# Altium PCB Arcadinator.PcbDoc
Units mil, origin at the board's own origin, x right, y up, seen from the top; angles counter-clockwise.
Board outline 1662.88 x 3742.88 mil, 2 copper layers (Top Layer, Bottom Layer); 28 components, 37 nets, 100 pads, 3 vias.
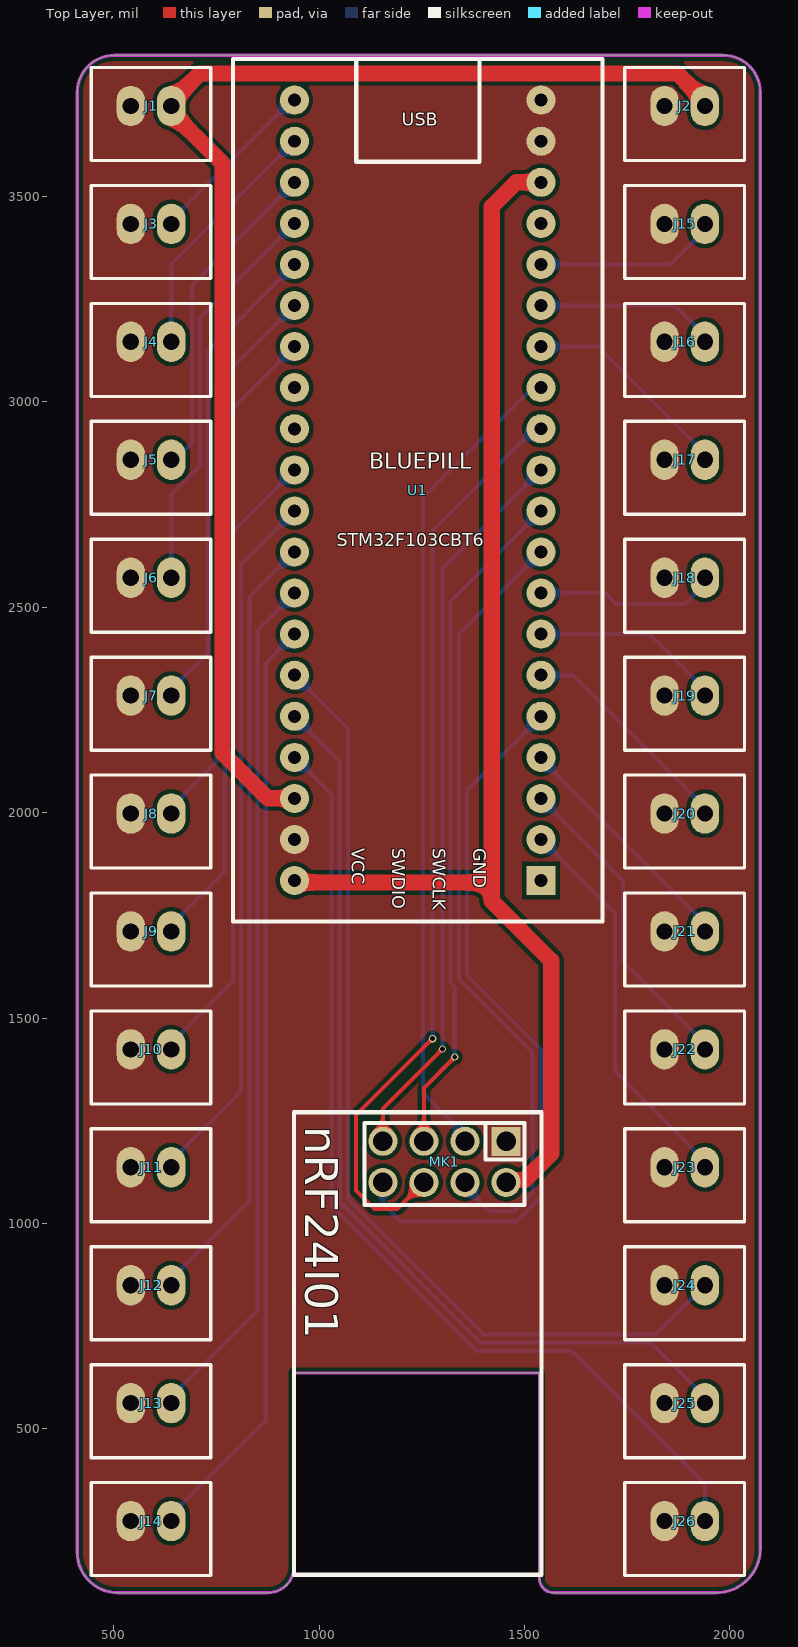
[diagram p0: Top Layer view]
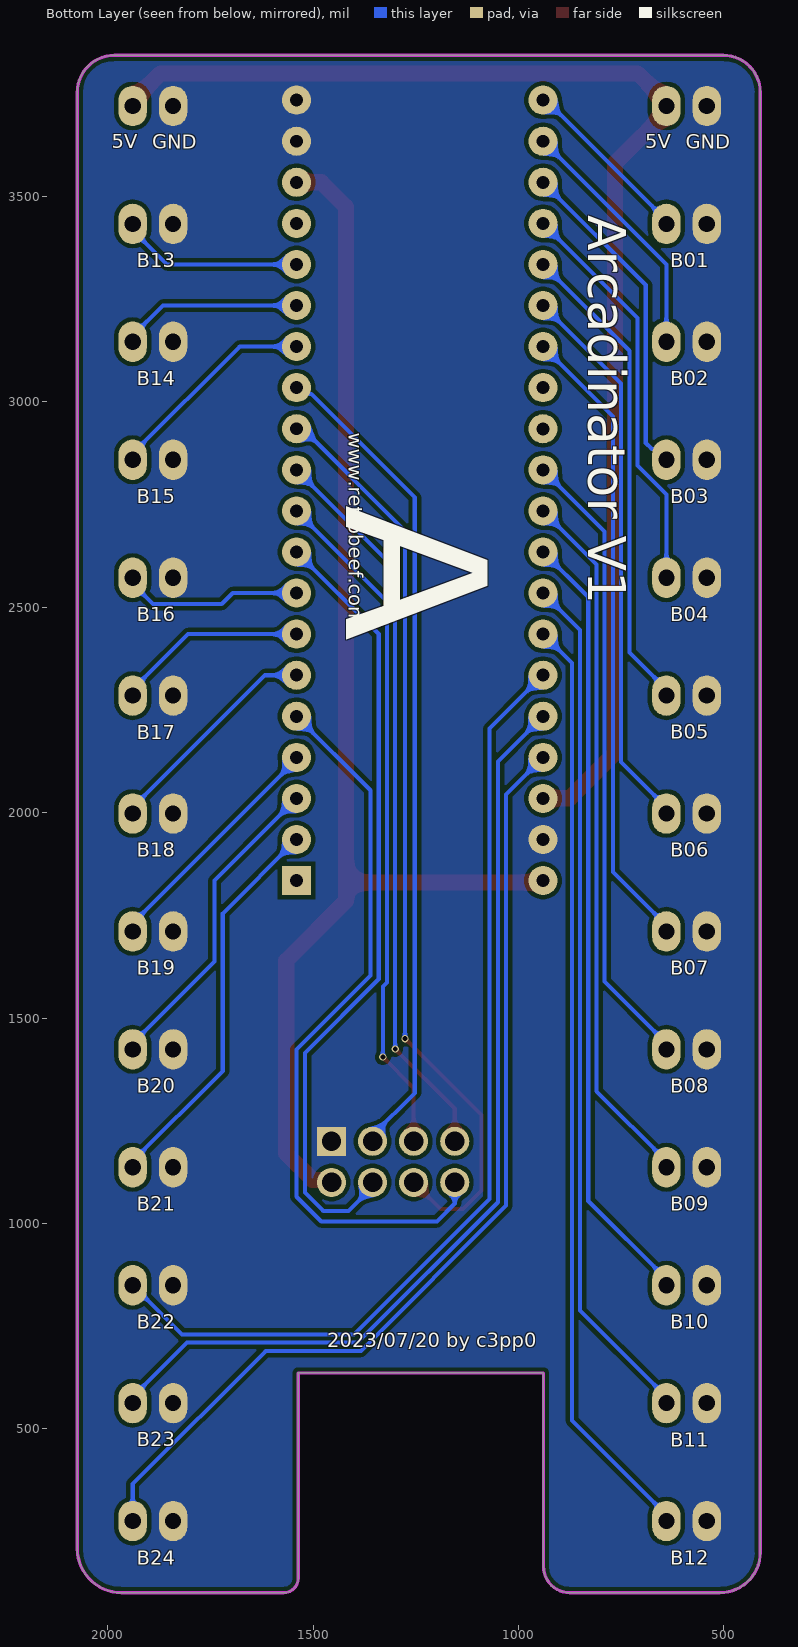
[diagram p1: Bottom Layer view, seen from below]
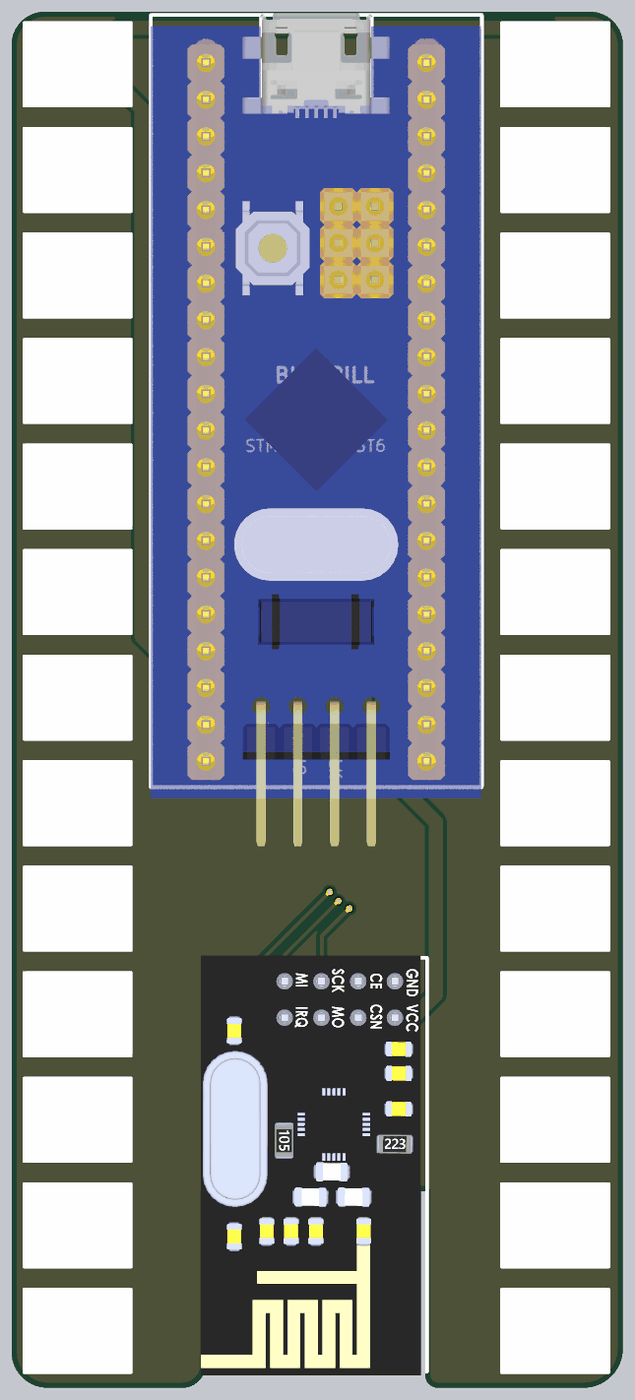
[diagram p2: 3D render of the assembled board from above, using the file's embedded part models]

## Layer stack, top to bottom
Top Solder: solder mask 0.4, Solder Resist, Dk 3.5
Top Layer: signal copper 1.4
Dielectric 1: dielectric 12.6, FR-4, Dk 4.8
Bottom Layer: signal copper 1.4
Bottom Solder: solder mask 0.4, Solder Resist, Dk 3.5

## Board outline
411.06,199.25 ccw(c509.25,199.25) 509.25,101.06 875.23,101.06 ccw(c875.23,164.77) 938.94,164.77 938.94,636.06 1536.06,636.06 1536.06,136.15 ccw(c1571.15,136.15) 1571.15,101.06 1966.74,101.06 ccw(c1966.74,208.26) 2073.94,208.26 2073.94,3753.84 ccw(c1983.84,3753.84) 1983.84,3843.94 501.16,3843.94 ccw(c501.16,3753.84) 411.06,3753.84

## Design rules (kind name [scope] priority, off if disabled: settings)
Clearance [All] p1: gap=10 ignorepadtopadclearanceinfootprint=FALSE except(0: Arc-Hole Track-Hole SMDPad-Hole THPad-Hole Via-Hole Fill-Hole Poly-Hole Region-Hole Text-Hole)
PlaneConnect [All] p1: planeconnectstyle=Direct reliefexpansion=20 reliefentries=4 reliefconductorwidth=10 reliefairgap=10
PolygonConnect [All] p1: connectstyle=Direct reliefconductorwidth=10 reliefentries=4 polygonreliefangle="90 Angle" airgapwidth=10
RoutingVias [All] p1: holewidth=28 width=50 viastyle="Through Hole" minholewidth=28 minwidth=50 maxholewidth=28 maxwidth=50
SolderMaskExpansion [All] p1: expansion=4 istentingtop=FALSE
Width [All] p1: maxlimit=78.74 minlimit=10 preferedwidth=10 minimp=50.000000 maximp=50.000000 favimp=50.000000
29 further rules are at their usual default settings.

## Components (designator, comment, footprint, x,y, rotation, side; value= is the part's Value field where it differs from the comment)
J1 "JST B2B-XH-A" "JST XH B2B-XH-A" 590.55,3720.47 r0 top
J2 "JST B2B-XH-A" "JST XH B2B-XH-A" 1889.76,3720.47 r0 top
J3 "JST B2B-XH-A" "JST XH B2B-XH-A" 590.55,3433.4 r0 top
J4 "JST B2B-XH-A" "JST XH B2B-XH-A" 590.55,3146.32 r0 top
J5 "JST B2B-XH-A" "JST XH B2B-XH-A" 590.55,2859.25 r0 top
J6 "JST B2B-XH-A" "JST XH B2B-XH-A" 590.55,2572.18 r0 top
J7 "JST B2B-XH-A" "JST XH B2B-XH-A" 590.55,2285.1 r0 top
J8 "JST B2B-XH-A" "JST XH B2B-XH-A" 590.55,1998.03 r0 top
J9 "JST B2B-XH-A" "JST XH B2B-XH-A" 590.55,1710.96 r0 top
J10 "JST B2B-XH-A" "JST XH B2B-XH-A" 590.55,1423.88 r0 top
J11 "JST B2B-XH-A" "JST XH B2B-XH-A" 590.55,1136.81 r0 top
J12 "JST B2B-XH-A" "JST XH B2B-XH-A" 590.55,849.74 r0 top
J13 "JST B2B-XH-A" "JST XH B2B-XH-A" 590.55,562.66 r0 top
J14 "JST B2B-XH-A" "JST XH B2B-XH-A" 590.55,275.59 r0 top
J15 "JST B2B-XH-A" "JST XH B2B-XH-A" 1889.76,3433.4 r0 top
J16 "JST B2B-XH-A" "JST XH B2B-XH-A" 1889.76,3146.32 r0 top
J17 "JST B2B-XH-A" "JST XH B2B-XH-A" 1889.76,2859.25 r0 top
J18 "JST B2B-XH-A" "JST XH B2B-XH-A" 1889.76,2572.18 r0 top
J19 "JST B2B-XH-A" "JST XH B2B-XH-A" 1889.76,2285.1 r0 top
J20 "JST B2B-XH-A" "JST XH B2B-XH-A" 1889.76,1998.03 r0 top
J21 "JST B2B-XH-A" "JST XH B2B-XH-A" 1889.76,1710.96 r0 top
J22 "JST B2B-XH-A" "JST XH B2B-XH-A" 1889.76,1423.88 r0 top
J23 "JST B2B-XH-A" "JST XH B2B-XH-A" 1889.76,1136.81 r0 top
J24 "JST B2B-XH-A" "JST XH B2B-XH-A" 1889.76,849.74 r0 top
J25 "JST B2B-XH-A" "JST XH B2B-XH-A" 1889.76,562.66 r0 top
J26 "JST B2B-XH-A" "JST XH B2B-XH-A" 1889.76,275.59 r0 top
MK1 "NRF24L01 BOARD" WIRELM-SMD_AI_NRF24L01 1305,1150 r270 top
U1 "BLUEPILL" BLUEPILL 1240.16,1834.65 r0 top

## Footprints (in the part's own frame and the unit in brackets; to place one, negate y for a bottom-side part, rotate by r counter-clockwise, add the part's x,y. Pads: shape width x height; smd on the part's side, far side on the other; paste and mask are expansions set on the pad)
BLUEPILL [mm]
  rect 1.8x1.8 hole 0.8 paste+0 mask+0.102: 1(7.62,0)
  round 1.8 hole 0.8 paste+0 mask+0.102: 2(7.618,2.542) 3(7.618,5.082) 4(7.618,7.622) 5(7.618,10.162) 6(7.618,12.702) 7(7.618,15.242) 8(7.618,17.782) 9(7.618,20.322) 10(7.618,22.862) 11(7.618,25.402) 12(7.618,27.942) 13(7.618,30.482) 14(7.618,33.022) 15(7.618,35.562) 16(7.618,38.102) 17(7.618,40.642) 18(7.618,43.182) 19(7.618,45.722) 20(7.618,48.262) 21(-7.622,48.262) 22(-7.622,45.722) 23(-7.622,43.182) 24(-7.622,40.642) 25(-7.622,38.102) 26(-7.622,35.562) 27(-7.622,33.022) 28(-7.622,30.482) 29(-7.62,27.94) 30(-7.622,25.402) 31(-7.622,22.862) 32(-7.622,20.322) 33(-7.622,17.782) 34(-7.622,15.242) 35(-7.622,12.702) 36(-7.622,10.162) 37(-7.622,7.622) 38(-7.622,5.082) 39(-7.622,2.542) 40(-7.622,0.002)
  silkscreen extent -11.43,-2.54 11.43,50.8, body extent -11.44,-6.63 11.42,50.93, height 12.47
"JST XH B2B-XH-A" [mm]
  oval 1.75x2.5 hole 1: 1(-1.25,0) 2(1.25,0)
  silkscreen extent -3.7,-3.38 3.7,2.38, body extent -3.7,-3.38 3.7,2.38, height 7
WIRELM-SMD_AI_NRF24L01 [mm]
  rect 1.8x1.8 hole 1.2 paste+0 mask+0.051: 1(-1.27,3.81)
  round 1.8 hole 1.2 paste+0 mask+0.051: 2(1.27,3.807) 3(-1.27,1.27) 4(1.27,1.27) 5(-1.27,-1.27) 6(1.27,-1.27) 7(-1.27,-3.81) 8(1.27,-3.81)
  silkscreen extent -3.07,-9.31 25.53,5.99, body extent -3.23,-9.64 25.77,5.56, height 7.55

## Part data
J1 J2 J3 J4 J5 J6 J7 J8 J9 J10 J11 J12 J13 J14 J15 J16 J17 J18 J19 J20 J21 J22 J23 J24 J25 J26: "2,54 mm JST-XH Connector, 2 Pins"
MK1: BOM_JLCPCB Part Class="Extended Part", BOM_Manufacturer=Ai-Thinker(安信可), BOM_Manufacturer Part=NF-04, BOM_Supplier=LCSC, BOM_Supplier Part=C90751, spicePre=M, spiceSymbolName="NRF24L01 BOARD"
U1: BOM_Supplier Part=undefined, Contributor=rom1nux, spicePre=U, spiceSymbolName=BLUEPILL

## Via types
v1: diameter 17.72, hole 11.81, Top Layer to Bottom Layer, 3 vias

## Nets (pads, with @x,y where several pads share a name; then routed paths per layer and width w, separated by ;. In a path a pad name is that pad's centre, name@x,y a point inside that pad or via, vN(x,y) a via of type N, cw(c..) or ccw(c..) an arc to the next point about the centre after c; other vN are vias at no path point)
+3.3: MK1.2 U1.18 U1.40 | length 3130.8
  Top Layer w39.37: U1.40 944.78,1830 1420,1830 ; MK1.2 1460.92,1106.03 1501.03,1106.03 1565,1170 1565,1640 1420,1785 1420,1830 ; U1.18 1479.71,3534.71 1420,3475 1420,1830
+5: J1.2 J2.2 U1.38 | length 3235.3
  Top Layer w39.37: U1.38 939.78,2035 875,2035 765,2145 765,3580.47 627.74,3717.74 709.82,3799.82 1871.33,3799.82 1938.98,3732.18 J2.2
BUT01: J3.2 U1.21 | length 429.7
  Bottom Layer w10: J3.2 639.76,3441.28 933.19,3734.71 U1.21
BUT02: J4.2 U1.22 | length 612.8
  Bottom Layer w10: J4.2 639.76,3334.39 U1.22
BUT03: J5.2 U1.23 | length 805.4
  Bottom Layer w10: J5.2 665.8,2885.29 675.29,2885.29 690,2900 690,3284.63 U1.23
BUT04: J6.2 U1.24 | length 986.9
  Bottom Layer w10: J6.2 639.76,2774.56 710,2844.79 710,3204.63 U1.24
BUT05: J7.2 U1.25 | length 1174
  Bottom Layer w10: J7.2 639.76,2299.87 730,2390.1 730,3124.63 U1.25
BUT06: J8.2 U1.26 | length 1361.1
  Bottom Layer w10: J8.2 639.76,2012.8 750,2123.03 750,3044.63 U1.26
BUT07: J9.2 U1.27 | length 1548.1
  Bottom Layer w10: J9.2 639.76,1725.72 770,1855.96 770,2964.63 U1.27
BUT08: J10.2 U1.30 | length 1535.4
  Bottom Layer w10: J10.2 639.76,1438.65 790,1588.88 790,2685 939.71,2834.71 U1.30
BUT09: J11.2 U1.31 | length 1722.3
  Bottom Layer w10: J11.2 639.76,1151.57 810,1321.81 810,2604.63 U1.31
BUT10: J12.2 U1.32 | length 1909.4
  Bottom Layer w10: J12.2 639.76,864.5 830,1054.74 830,2524.63 U1.32
BUT11: J13.2 U1.33 | length 2096.4
  Bottom Layer w10: J13.2 639.76,577.43 850,787.66 850,2444.63 U1.33
BUT12: J14.2 U1.34 | length 2283.5
  Bottom Layer w10: J14.2 639.76,290.35 870,520.59 870,2364.63 U1.34
BUT13: J15.2 U1.16 | length 448.4
  Bottom Layer w10: U1.16 1855.05,3334.71 1938.98,3418.63 J15.2
BUT14: J16.2 U1.15 | length 444.2
  Bottom Layer w10: U1.15 1865.36,3234.71 1938.98,3161.09 J16.2
BUT15: J17.2 U1.14 | length 521.6
  Bottom Layer w10: U1.14 1678.29,3134.71 1938.98,2874.02 J17.2
BUT16: J18.2 U1.8 | length 445.2
  Bottom Layer w10: U1.8 1695.42,2534.71 1722.16,2507.97 1889.53,2507.97 1938.98,2557.41 J18.2
BUT17: J19.2 U1.7 | length 469.5
  Bottom Layer w10: U1.7 1804.14,2434.71 1938.98,2299.87 J19.2
BUT18: J20.2 U1.6 | length 547
  Bottom Layer w10: U1.6 1617.07,2334.71 1938.98,2012.8 J20.2
BUT19: J21.2 U1.4 | length 589
  Bottom Layer w10: U1.4 1540.08,2129.66 1938.98,1730.76 J21.2
BUT20: J22.2 U1.3 | length 776.1
  Bottom Layer w10: U1.3 1739.72,1835.07 1739.72,1637.91 1938.98,1438.65 J22.2
BUT21: J23.2 U1.2 | length 963.1
  Bottom Layer w10: U1.2 1719.72,1755.07 1719.72,1370.83 1938.98,1151.57 J23.2
BUT22: J24.2 U1.35 | length 2383.8
  Bottom Layer w10: U1.35 1070,2204.78 1070,1060 1400,730 1819.24,730 J24.2
BUT23: J25.2 U1.36 | length 2328.7
  Bottom Layer w10: U1.36 1050,2124.78 1050,1051.72 1391.72,710 1806.4,710 1938.98,577.43 J25.2
BUT24: J26.2 U1.37 | length 2408.5
  Bottom Layer w10: U1.37 1030,2044.78 1030,1043.43 1383.43,690 1615,690 1938.98,366.02 J26.2
CE: MK1.3 U1.13 | length 2008.4
  Bottom Layer w10: MK1.3 1355,1215 1252.28,1317.72 1252.28,2767.28 1504.23,3019.23 1508.13,3019.23 1523.61,3034.71 U1.13
CSN: MK1.4 U1.9 | length 1936.4
  Bottom Layer w10: MK1.4 1355,1088.68 1413.68,1030 1475,1030 1520,1075 1520,1415 1340,1595 1340,2434.63 U1.9
GND: J1.1 J2.1 J3.1 J4.1 J5.1 J6.1 J7.1 J8.1 J9.1 J10.1 J11.1 J12.1 J13.1 J14.1 J15.1 J16.1 J17.1 J18.1 J19.1 J20.1 J21.1 J22.1 J23.1 J24.1 J25.1 J26.1 MK1.1 U1.19 U1.20 U1.39 | length 36.1
  Top Layer w10: U1.20 U1.20@1547.19,3727.59 ; J2.1@1833.43,3727.59 J2.1
  Top Layer w39.37: U1.39@931.55,1934.71 U1.39 ; MK1.1@1450,1205 MK1.1 ; U1.19 U1.19@1540.37,3635
IRQ: MK1.8 U1.5 | length 1798.2
  Bottom Layer w10: MK1.8 1155,1048.58 1198.58,1005 1480,1005 1540,1065 1540,1423.28 1360,1603.28 1360,2054.63 U1.5
MISO: MK1.7 U1.11 | length 1794.2
  Top Layer w10: MK1.7 1155,1280 v1(1300,1425)
  Bottom Layer w10: v1(1300,1425) 1300,2594.63 U1.11
MOSI: MK1.6 U1.12 | length 2260.7
  Top Layer w10: MK1.6 1190,1035 1135,1035 1090,1080 1090,1263.86 v1(1276.14,1450)
  Bottom Layer w10: v1(1276.14,1450) 1276.14,2686.14 1524.71,2934.71 U1.12
NetU1_1: U1.1
NetU1_17: U1.17
NetU1_28: U1.28
NetU1_29: U1.29
SCK: MK1.5 U1.10 | length 1661.1
  Top Layer w10: MK1.5 1255,1330 v1(1330,1405)
  Bottom Layer w10: v1(1330,1405) 1330,1576.72 1320,1586.72 1320,2514.63 U1.10

## Polygon pours and split planes (outlines as drawn)
GND on Top Layer "GND_L01_P002" (solid, pour order 2): 411.06,199.25 ccw(c509.25,199.25) 509.25,101.06 875.23,101.06 ccw(c875.23,164.77) 938.94,164.77 938.94,636.06 1536.06,636.06 1536.06,136.15 ccw(c1571.15,136.15) 1571.15,101.06 1966.74,101.06 ccw(c1966.74,208.26) 2073.94,208.26 2073.94,3753.84 ccw(c1983.84,3753.84) 1983.84,3843.94 501.16,3843.94 ccw(c501.16,3753.84) 411.06,3753.84
GND on Bottom Layer "GND_L02_P003" (solid, pour order 3): 411.06,199.25 ccw(c509.25,199.25) 509.25,101.06 875.23,101.06 ccw(c875.23,164.77) 938.94,164.77 938.94,636.06 1536.06,636.06 1536.06,136.15 ccw(c1571.15,136.15) 1571.15,101.06 1966.74,101.06 ccw(c1966.74,208.26) 2073.94,208.26 2073.94,3753.84 ccw(c1983.84,3753.84) 1983.84,3843.94 501.16,3843.94 ccw(c501.16,3753.84) 411.06,3753.84

## Keep-outs
Keep-Out Layer:
  the board outline again, w7.87

## Silkscreen, mask and mechanical layers (free items; w line width, h text height)
Bottom Overlay:
  text "5V" at 690.79,3605.67 h60
  text "5V" at 1990,3605.67 h60
  text "GND" at 592.03,3604.57 h60
  text "GND" at 1891.24,3604.57 h60
  text "Arcadinator V1" at 860,3455 h157.48 r90
  text "B01" at 630,3315.67 h60
  text "B13" at 1929.21,3315.67 h60
  text "B02" at 630,3028.59 h60
  text "B14" at 1929.21,3027.93 h60
  text "www.retrobeef.com" at 1425,2925 h60 r90
  text "A" at 1567.35,2750 h787.4 r90
  text "B03" at 630,2741.52 h60
  text "B15" at 1929.21,2741.52 h60
  text "B04" at 630,2454.45 h60
  text "B16" at 1929.21,2454.45 h60
  text "B05" at 630,2167.37 h60
  text "B17" at 1929.21,2166.71 h60
  text "B06" at 630,1880.3 h60
  text "B18" at 1929.21,1880.3 h60
  text "B07" at 630,1593.23 h60
  text "B19" at 1929.21,1593.23 h60
  text "B08" at 630,1306.15 h60
  text "B20" at 1929.21,1306.15 h60
  text "B09" at 630,1019.08 h60
  text "B21" at 1929.21,1018.41 h60
  text "B10" at 630,732.01 h60
  text "B22" at 1929.21,731.34 h60
  text "2023/07/20 by c3pp0" at 1465.06,686.27 h60
  text "B23" at 1929.21,444.93 h60
  text "B11" at 630,444.27 h60
  text "B12" at 630,157.19 h60
  text "B24" at 1929.21,157.19 h60
Mechanical 32:
  lines w10: 406.06,199.25 ccw(c509.25,199.25) 509.25,96.06 875.23,96.06 ccw(c875.23,164.77) 943.94,164.77 943.94,631.06 1531.06,631.06 1531.06,136.15 ccw(c1571.15,136.15) 1571.15,96.06 1966.74,96.06 ccw(c1966.74,208.26) 2078.94,208.26 2078.94,3753.84 ccw(c1983.84,3753.84) 1983.84,3848.94 501.16,3848.94 ccw(c501.16,3753.84) 406.06,3753.84 406.06,199.25

## Text inside footprints (layer, text, board x,y; h text height)
MK1: Top Overlay "nRF24l01" at 966.5,1236.5 h80 r270
U1: Top Overlay "STM32F103CBT6" at 1043.3,2648.17 h31.5; Top Overlay "USB" at 1200.73,3671.8 h31.5; Top Overlay "GND" at 1375.13,1913.46 h31.5 r270; Top Overlay "SWCLK" at 1276.61,1913.38 h31.5 r270; Top Overlay "SWDIO" at 1178.2,1913.39 h31.5 r270; Top Overlay "VCC" at 1079.78,1913.35 h31.5 r270